# Altium PCB usb board.PcbDoc
Units mm, origin at the board's own origin, x right, y up, seen from the top; angles counter-clockwise.
Board outline 36.7 x 18.6 mm, 2 copper layers (Top Layer, Bottom Layer); 21 components, 10 nets, 104 pads, 45 vias.
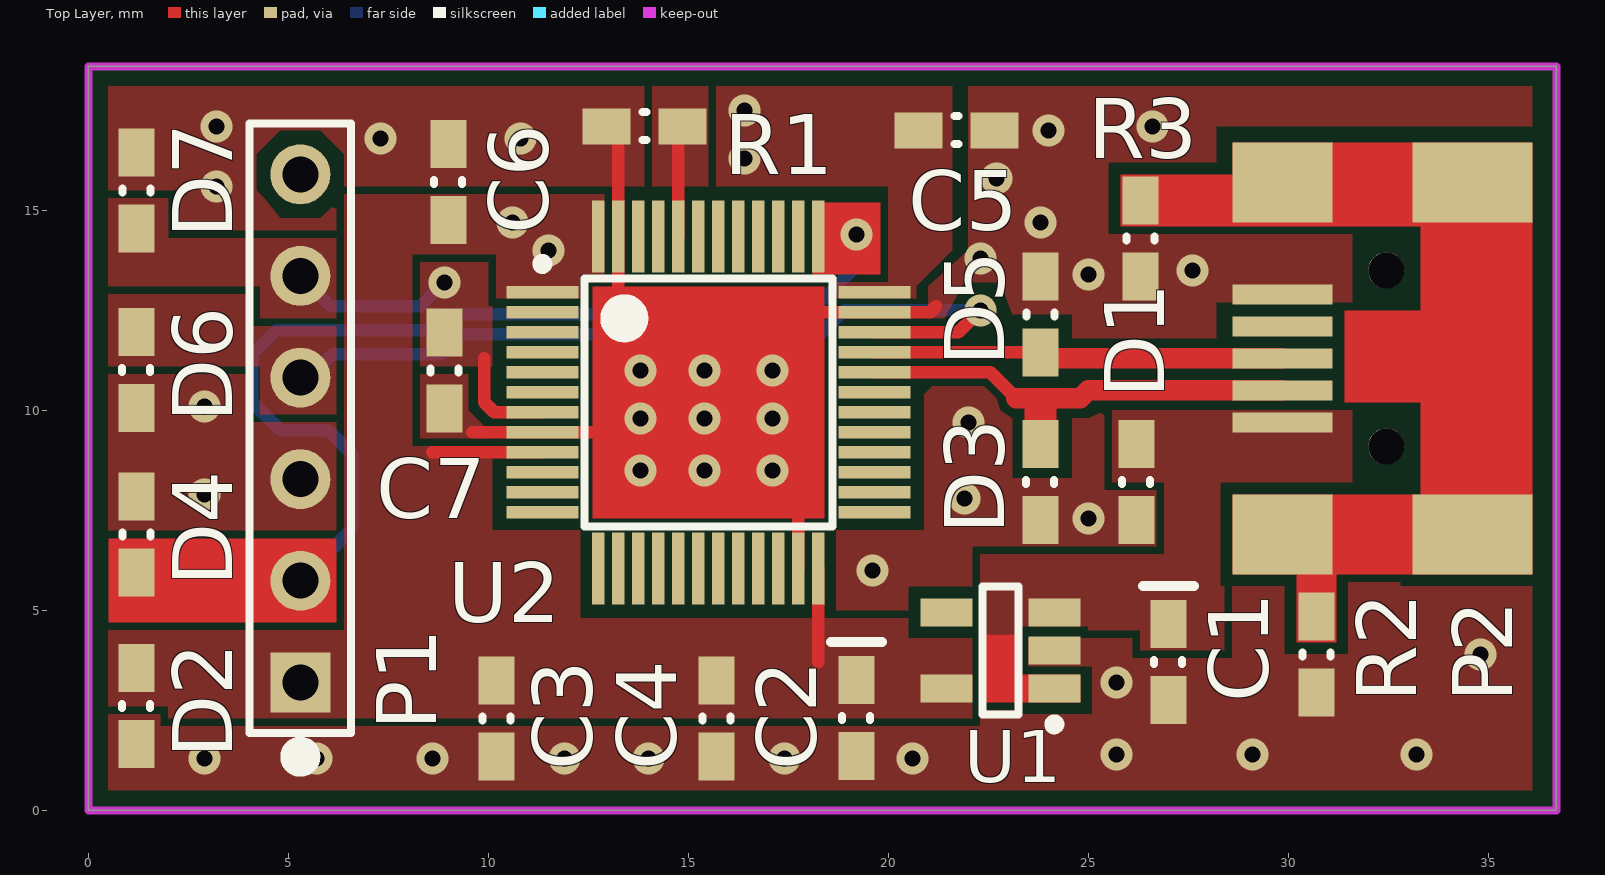
[diagram p0: Top Layer view]
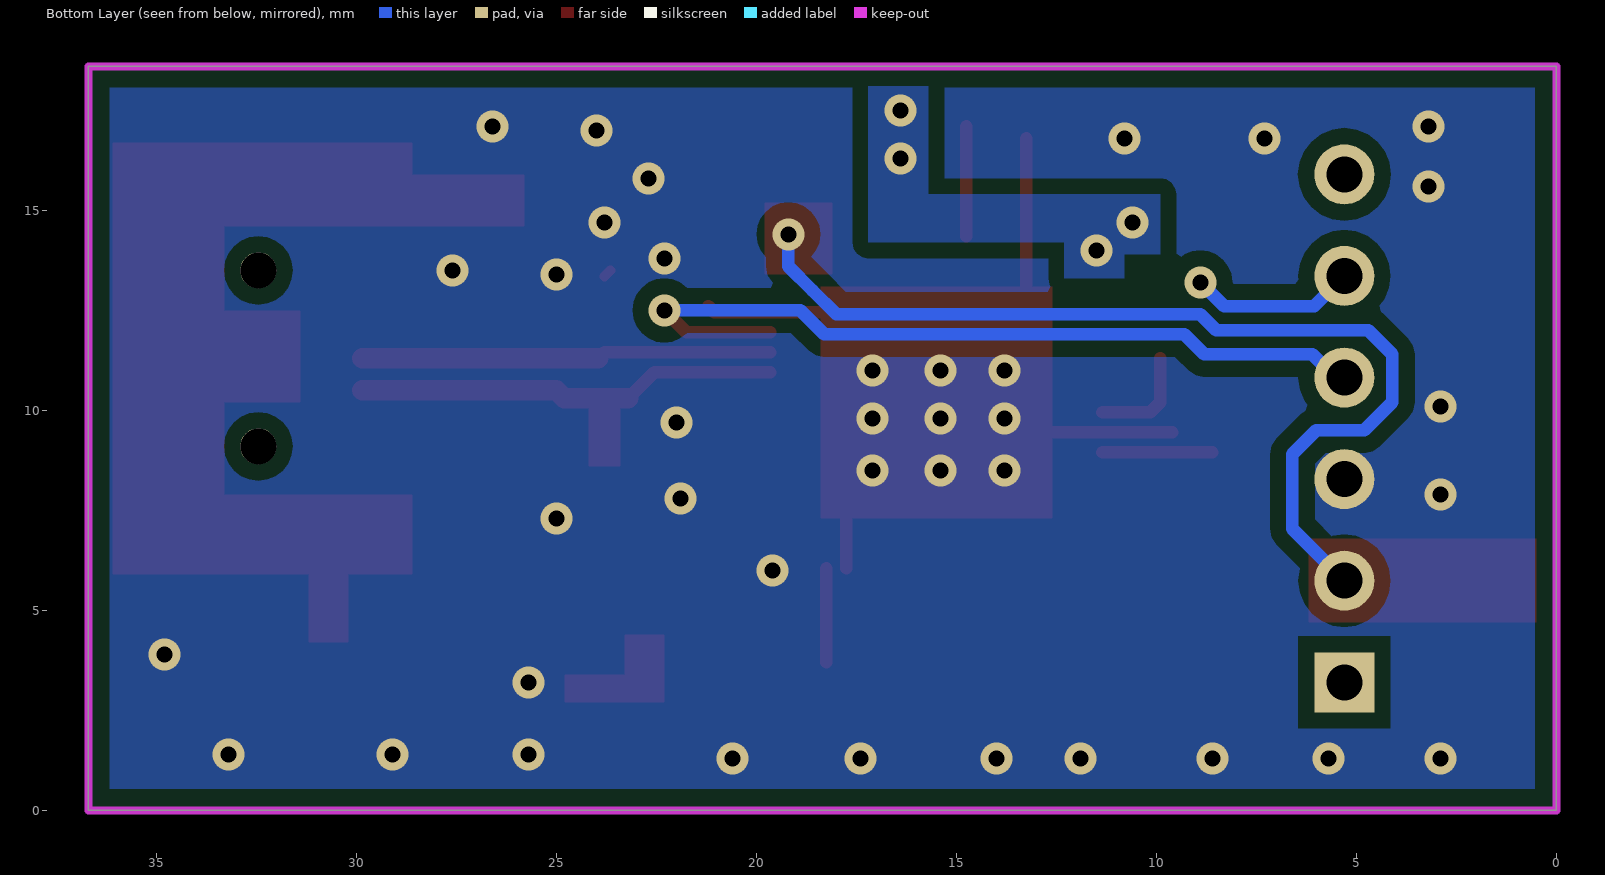
[diagram p1: Bottom Layer view, seen from below]

## Layer stack, top to bottom
Top Solder: solder mask 0.0102, Solder Resist, Dk 3.5
Top Layer: signal copper 0.0356
Dielectric 1: dielectric 0.32, FR-4, Dk 4.8
Bottom Layer: signal copper 0.0356
Bottom Solder: solder mask 0.0102, Solder Resist, Dk 3.5

## Board outline
0,0 0,18.6 36.7,18.6 36.7,0

## Design rules (kind name [scope] priority, off if disabled: settings)
Clearance Clearance_2 [InNamedPolygon('GND_L02_P030')] p1: gap=0.4
Clearance Clearance_1 [All vs (OnLayer('Keep-Out Layer'))] p2: gap=0.203
Clearance [All] p3: gap=0.178
ComponentClearance [All] p1: gap=0.508 collisioncheckmode=3 verticalgap=2540 showdistances=FALSE
HoleSize [All] p1: absolutevalues=TRUE maxlimit=100 minlimit=0.4 maxpercent=80.000 minpercent=20.000
HoleToHoleClearance [All] p1: gap=0.508 allowstackedmicrovias=TRUE
MinimumAnnularRing [All] p1: minimumring=0.076
MinimumSolderMaskSliver [All] p1: minsoldermaskwidth=0
PlaneConnect [All] p1: planeconnectstyle=Direct reliefexpansion=0.508 reliefentries=4 reliefconductorwidth=0.254 reliefairgap=0.254
PolygonConnect [All] p1: connectstyle=Direct reliefconductorwidth=0.254 reliefentries=4 polygonreliefangle="90 Angle" airgapwidth=0.254
RoutingVias [All] p1: holewidth=0.4 width=0.8 viastyle="Through Hole" minholewidth=0.4 minwidth=0.8 maxholewidth=50 maxwidth=100
SilkToSilkClearance [All] p1: silktosilkclearance=0
SilkToSolderMaskClearance [IsPad] p1: minsilkscreentomaskgap=0.025 clearancetoexposedcopper=TRUE
SolderMaskExpansion [All] p1: expansion=0.102
Width [All] p1: maxlimit=2.54 minlimit=0.254 preferedwidth=0.508 checkconnectedcopper=TRUE
23 further rules are at their usual default settings.

## Components (designator, comment, footprint, x,y, rotation, side; value= is the part's Value field where it differs from the comment)
C1 "0603" diode_0603_HandSoldering 27,3.7 r270 top
C2 "0603" diode_0603_HandSoldering 19.2,2.3 r270 top
C3 "0603" 0603_HandSoldering 10.2,2.3 r90 top
C4 "0603" 0603_HandSoldering 15.7,2.3 r90 top
C5 "0603" 0603_HandSoldering 21.7,17 r180 top
C6 "0603" 0603_HandSoldering 9,15.7 r270 top
C7 "0603" 0603_HandSoldering 8.9,11 r90 top
D1 "0603" 0603_HandSoldering 26.2,8.2 r270 top
D2 "0603" 0603_HandSoldering 1.2,2.6 r270 top
D3 "0603" 0603_HandSoldering 23.8,8.2 r270 top
D4 "0603" 0603_HandSoldering 1.2,6.9 r90 top
D5 "0603" 0603_HandSoldering 23.8,12.4 r90 top
D6 "0603" 0603_HandSoldering 1.2,11 r270 top
D7 "0603" 0603_HandSoldering 1.2,15.5 r90 top
P1 "SWD" HDR1X6 5.3,3.2 r90 top
P2 "USB mini B" "USB mini B receptacle" 32.6,11.3 r90 top
R1 "0603" 0603_HandSoldering 13.9,17.1 r180 top
R2 "0603" 0603_HandSoldering 30.7,3.9 r90 top
R3 "0603" 0603_HandSoldering 26.3,14.3 r90 top
U1 "NCV8163ASN330T1G" NCV8163ASN330T1G_SOT32_5 22.8,4 r180 top
U2 "STM32F072CBT" LQFP48 15.5,10.2 r0 top

## Footprints (in the part's own frame and the unit in brackets; to place one, negate y for a bottom-side part, rotate by r counter-clockwise, add the part's x,y. Pads: shape width x height; smd on the part's side, far side on the other; paste and mask are expansions set on the pad)
0603_HandSoldering [mm] "Chip Resistor, 2-Leads, Body 1.6x0.8mm, IPC Medium Density"
  rect 1.2x0.9 smd: 1(-0.954,0) 2(0.946,0)
  silkscreen extent -0.05,-0.36 0.05,0.34, body extent -0.85,-0.48 0.85,0.47, height 0.6
diode_0603_HandSoldering [mm] "Chip Diode, 2-Leads, Body 1.6x0.8mm, IPC Medium Density"
  rect 1.2x0.9 smd: 1(-0.954,0) 2(0.946,0)
  silkscreen extent -1.91,-0.63 0.05,0.63, body extent -0.85,-0.48 0.85,0.47, height 0.6
HDR1X6 [mm] "Connector; Header; 6 Position"
  rect 1.5x1.5 hole 0.9: 1(0,0)
  round 1.5 hole 0.9: 2(2.54,0) 3(5.08,0) 4(7.62,0) 5(10.16,0) 6(12.7,0)
  silkscreen extent -2.11,-1.27 13.97,1.27
LQFP48 [mm] "TSQFP, 48-Leads, Body 7,00x7,00mm, Pitch 0,50mm, IPC Medium Density"
  rect 1.8x0.32 smd: 1(-4.15,2.75) 2(-4.15,2.25) 3(-4.15,1.75) 4(-4.15,1.25) 5(-4.15,0.75) 6(-4.15,0.25) 7(-4.15,-0.25) 8(-4.15,-0.75) 9(-4.15,-1.25) 10(-4.15,-1.75) 11(-4.15,-2.25) 12(-4.15,-2.75) 25(4.15,-2.75) 26(4.15,-2.25) 27(4.15,-1.75) 28(4.15,-1.25) 29(4.15,-0.75) 30(4.15,-0.25) 31(4.15,0.25) 32(4.15,0.75) 33(4.15,1.25) 34(4.15,1.75) 35(4.15,2.25) 36(4.15,2.75)
  rect 0.32x1.8 smd: 13(-2.75,-4.15) 14(-2.25,-4.15) 15(-1.75,-4.15) 16(-1.25,-4.15) 17(-0.75,-4.15) 18(-0.25,-4.15) 19(0.25,-4.15) 20(0.75,-4.15) 21(1.25,-4.15) 22(1.75,-4.15) 23(2.25,-4.15) 24(2.75,-4.15) 37(2.75,4.15) 38(2.25,4.15) 39(1.75,4.15) 40(1.25,4.15) 41(0.75,4.15) 42(0.25,4.15) 43(-0.25,4.15) 44(-0.75,4.15) 45(-1.25,4.15) 46(-1.75,4.15) 47(-2.25,4.15) 48(-2.75,4.15)
  silkscreen extent -4.27,-3.1 3.1,3.58, body extent -3.5,-3.5 3.5,3.5, height 1.6
NCV8163ASN330T1G_SOT32_5 [mm] "SOT23, 5-Leads, Body 3,00x2,75mm, Pitch 0,95mm, IPC Medium Density"
  rect 1.3x0.7 smd: 1(-1.35,0.95) 2(-1.35,0) 3(-1.35,-0.95) 4(1.35,-0.95) 5(1.35,0.95)
  silkscreen extent -1.48,-1.6 0.45,1.97, body extent -0.82,-1.57 0.82,1.58, height 1.1
"USB mini B receptacle" [mm] "popravek"
  rect 0.5x2.5 smd: 1(-1.6,2.75) 2(-0.8,2.75) 3(0,2.75) 4(0.8,2.75) 5(1.6,2.75)
  rect 2x3 smd: 6(-4.4,-2) 6(4.4,-2)
  rect 2x2.5 smd: 6(-4.4,2.75) 6(4.4,2.75)
  round 0.9 hole 0.9: ""(-2.2,0.15) ""(2.2,0.15)
  body extent -4.95,-5.75 4.95,3.25, height 4

## Part data
C1 C2: library part "Tantalum Capacitor", "Tantalum Capacitor"
C3 C4 C5 C6 C7: library part Capacitor, "Capacitor"
D1 D2 D3 D4 D5 D6 D7: library part PGB1010603, "ESD diode"
P1: library part "SWD Header", "STM32 SWD Header"
P2: "USB 2.0 mini B receptacle"
R1 R2 R3: library part Resistor, "Resistor"
U1: "3V3 LDO"
U2: "ARM Cortex M0 MCU"

## Via types
v1: diameter 0.8, hole 0.4, Top Layer to Bottom Layer, tented both sides, 45 vias

## Nets (pads, with @x,y where several pads share a name; then routed paths per layer and width w, separated by ;. In a path a pad name is that pad's centre, name@x,y a point inside that pad or via, vN(x,y) a via of type N, cw(c..) or ccw(c..) an arc to the next point about the centre after c; other vN are vias at no path point)
3V3: C2.1 C3.2 C4.2 C5.2 C6.2 D2.1 P1.1 U1.5 U2.1 U2.9 U2.24 U2.36 U2.48 | length 5.1
  Top Layer w0.32: 8.6,8.95 U2.9 ; 18.25,3.7 U2.24
  other v1: 11.5,14 10.6,14.7 16.4,16.3 16.4,17.5
5VUSB: C1.1 D1.1 P2.1 U1.1 U1.3
GND: C1.2 C2.2 C3.1 C4.1 C5.1 C6.1 C7.1 D1.2 D2.2 D3.2 D4.2 D5.2 D6.2 D7.2 P1.3 P2.5 R1.2 R2.1 R3.1 U1.2 U2.8 U2.23 U2.35 U2.47 | length 11.9
  Top Layer w0.254: D5.2@23.646,13.5 D5.2
  Top Layer w0.32: 9.6,9.45 U2.8 12.8,9.45 ; 13.25,12.95 U2.47 R1.2@13.25,16.804 ; U2.23 17.75,7.6 ; 18.2,12.45 U2.35 21.05,12.45 21.2,12.6
  other v1: 2.9,1.3 5.7,1.3 8.6,1.3 11.9,1.3 14,1.3 17.4,1.3 20.6,1.3 25.7,1.4 29.1,1.4 33.2,1.4 25.7,3.2 34.8,3.9 19.6,6 25,7.3 21.9,7.8 2.9,7.9 13.8,8.5 15.4,8.5 17.1,8.5 22,9.7 13.8,9.8 15.4,9.8 17.1,9.8 2.9,10.1 13.8,11 15.4,11 17.1,11 25,13.4 27.6,13.5 22.3,13.8 23.8,14.7 3.2,15.6 22.7,15.8 7.3,16.8 10.8,16.8 24,17 3.2,17.1 26.6,17.1
NetC7_2: C7.2 D7.1 P1.5 U2.7 | length 6.8
  Top Layer w0.32: 9.9,11.3 9.9,10.2 10.15,9.95 U2.7
  Bottom Layer w0.32: P1.5 6.06,12.6 8.3,12.6 v1(8.9,13.2)
NetD3_1: D3.1 P2.2 U2.32 | length 10.6
  Top Layer w0.32: U2.32 22.55,10.95 23.2,10.3
  Top Layer w0.508: 23.2,10.3 24.8,10.3 25,10.5 P2.2
NetD4_1: D4.1 P1.2 U2.37 | length 24.7
  Bottom Layer w0.32: P1.2 6.6,7.04 6.6,8.9 6,9.5 4.8,9.5 4.1,10.2 4.1,11.4 4.7,12 8.5,12 8.9,12.4 17.996,12.4 18.594,12.998 18.598,12.998 19.2,13.6 v1(19.2,14.4)
NetD5_1: D5.1 P2.3 U2.33 | length 10.3
  Top Layer w0.254: D5.1@23.796,11.45 D5.1 D5.1@23.946,11.3
  Top Layer w0.32: U2.33 D5.1@23.796,11.45
  Top Layer w0.508: D5.1@23.946,11.3 P2.3
NetD6_1: D6.1 P1.4 U2.34 | length 20.6
  Top Layer w0.32: U2.34 21.75,11.95 v1(22.3,12.5)
  Bottom Layer w0.254: P1.4 P1.4@5.52,10.82
  Bottom Layer w0.32: P1.4@5.52,10.82 6.1,11.4 8.8,11.4 9.3,11.9 18.3,11.9 18.9,12.5 v1(22.3,12.5)
NetR1_1: R1.1 U2.44 | length 2.7
  Top Layer w0.32: U2.44 R1.1@14.75,17.1
SHIELD: P2.6 R2.2 R3.2 | length 4.8
  Top Layer w0.254: P2.6@29.85,6.9 P2.6@34.6,6.9
pads on no net: P1.6 P2. P2.4 U1.4 U2.2 U2.3 U2.4 U2.5 U2.6 U2.10 U2.11 U2.12 U2.13 U2.14 U2.15 U2.16 U2.17 U2.18 U2.19 U2.20 U2.21 U2.22 U2.25 U2.26 U2.27 U2.28 U2.29 U2.30 U2.31 U2.38 U2.39 U2.40 U2.41 U2.42 U2.43 U2.45 U2.46

## Polygon pours and split planes (outlines as drawn)
NetC7_2 on Top Layer "NETC7_2_L01_P020" (solid, remove dead copper, pour order 20): 0.5,13.1 4.3,13.1 4.3,12.3 6.2,12.3 6.2,14.3 2,14.3 2,15.3 0.5,15.3
NetD6_1 on Top Layer "NETD6_1_L01_P018" (solid, remove dead copper, pour order 18): 0.5,11.1 0.5,12.9 4.1,12.9 4.1,12.1 6.2,12.1 6.2,9.9 4.3,9.9 4.3,11.1
GND on Top Layer "GND_L01_P016" (solid, remove dead copper, pour order 16): 0.5,7 0.5,10.9 4.1,10.9 4.1,9.7 6.2,9.7 6.2,7
NetC7_2 on Top Layer "NETC7_2_L01_P014" (solid, remove dead copper, pour order 14): 8.3,11.1 10.1,11.1 10.1,12.6 10,12.6 10,13.7 8.3,13.7
GND on Top Layer "GND_L01_P012" (solid, remove dead copper, pour order 12): 9.9,9.6 9.5,10 9.5,10.9 8.3,10.9 8.3,9.3 9.9,9.3
5VUSB on Top Layer "5VUSB_L01_P000" (solid, remove dead copper, pour order 0): 31.6,10 25.6,10 25.6,8.9 25.6,8.2 26.9,8.2 26.9,6.4 22.3,6.4 22.3,5.1 22.3,4.4 23.3,4.4 23.3,4.6 25,4.6 25,4.5 26.3,4.5 26.3,4 28.4,4 28.4,5.6 28.3,5.6 28.3,8.2 31.6,8.2
3V3 on Top Layer "3V3_L01_P002" (solid, remove dead copper, pour order 2): 22.1,3.2 22.1,4.3 20.5,4.3 20.5,4.8 12.3,4.8 12.3,7 10.1,7 10.1,9.1 8.1,9.1 8.1,13.9 10.2,13.9 10.2,12.8 12.3,12.8 12.3,13.4 12.9,13.4 12.9,15.4 6.4,15.4 6.4,4.5 0.5,4.5 0.5,2.6 2,2.6 2,2.3 6.4,2.3 22.1,2.3
GND on Top Layer "GND_L01_P006" (solid, remove dead copper, pour order 6): 26.7,8 26.7,6.6 22.1,6.6 22.1,5.6 20.5,5.6 20.5,5 18.7,5 18.7,7 20.9,7 20.9,10.4 21.1,10.6 22.4,10.6 22.7,10.3 22.8,10 23.1,9.8 23.1,8.3 24.6,8.3 24.6,9.8 25,9.8 25.4,10 25.4,8
GND on Top Layer "GND_L01_P004" (solid, remove dead copper, pour order 4): 29.9,3.9 29.9,5.6 28.6,5.6 28.6,3.8 26.1,3.8 26.1,4.3 23.5,4.3 23.5,3.6 25.1,3.6 25.1,2.4 23.2,2.4 23.2,2.5 22.3,2.5 22.3,2.1 1.8,2.1 1.8,2.4 0.5,2.4 0.5,0.5 36.1,0.5 36.1,5.6 32.8,5.6 32.8,5.7 31.5,5.7 31.5,3.9
GND on Top Layer "GND_L01_P008" (solid, remove dead copper, pour order 8): 31.6,12.7 31.6,14.4 25.5,14.4 25.5,16.2 28.2,16.2 28.2,17.1 36.1,17.1 36.1,18.1 22,18.1 22,14 21,13.1 21,12.3 21.4,12.3 21.9,13.2 22.8,13.2 23.1,12.4 24.6,12.4 24.6,11.8 28.2,11.8 28.2,12.7
GND on Top Layer "GND_L01_P022" (solid, remove dead copper, pour order 22): 0.5,15.5 2.2,15.5 2.2,14.5 6.2,14.5 6.2,15.2 5.8,14.8 4.8,14.8 4.4,15.3 4.2,15.5 4.2,16.1 4.2,16.4 4.7,16.9 4.8,17 5.8,17 6.4,16.4 6.4,15.6 13.9,15.6 13.9,18.1 0.5,18.1
NetR1_1 on Top Layer "NETR1_1_L01_P024" (solid, remove dead copper, pour order 24): 14.1,15.6 14.1,18.1 15.5,18.1 15.5,15.6
3V3 on Top Layer "3V3_L01_P026" (solid, remove dead copper, pour order 26): 15.7,18.1 21.6,18.1 21.6,16.3 21.6,14 20.8,13.2 20.7,13.1 20.7,12.8 18.7,12.8 18.7,13.2 20,13.2 20,15.5 20,15.6 15.7,15.6
3V3 on Bottom Layer "3V3_L02_P028" (solid, remove dead copper, pour order 28): 9.9,15.4 9.9,13.9 10.8,13.9 10.8,13.3 12.3,13.3 12.3,14.2 17.2,14.2 17.2,18.1 15.7,18.1 15.7,15.4
GND on Bottom Layer "GND_L02_P030" (solid, remove dead copper, pour order 30): 0.5,0.5 0.5,18.1 36.2,18.1 36.2,0.5

## Keep-outs
Keep-Out Layer:
  the board outline again, w0.2

## Other copper
Top Layer:
  rectangle net NetD4_1: 0.5,4.7 6.2,6.8
  rectangle net SHIELD: 25.8,14.6 33.4,15.9
  rectangle net GND: 12.6,7.3 18.4,13.1
  rectangle net SHIELD: 28.6,14.7 36.1,16.7
  rectangle net SHIELD: 33.3,7.8 36.1,14.8
  rectangle net SHIELD: 28.6,5.9 36.1,7.9
  rectangle net 5VUSB: 22.3,2.7 24.8,3.4
  rectangle net 5VUSB: 22.3,3.2 23.3,4.4
  rectangle net SHIELD: 30.2,4.2 31.2,6
  rectangle net NetD3_1: 23.4,8.6 24.2,10.3
  rectangle net SHIELD: 31.4,10.2 33.3,12.5
  rectangle net NetD4_1: 18.1,13.4 19.8,15.2